# EAGLE board Thin_Spacer_C (EAGLE 9.5.2)
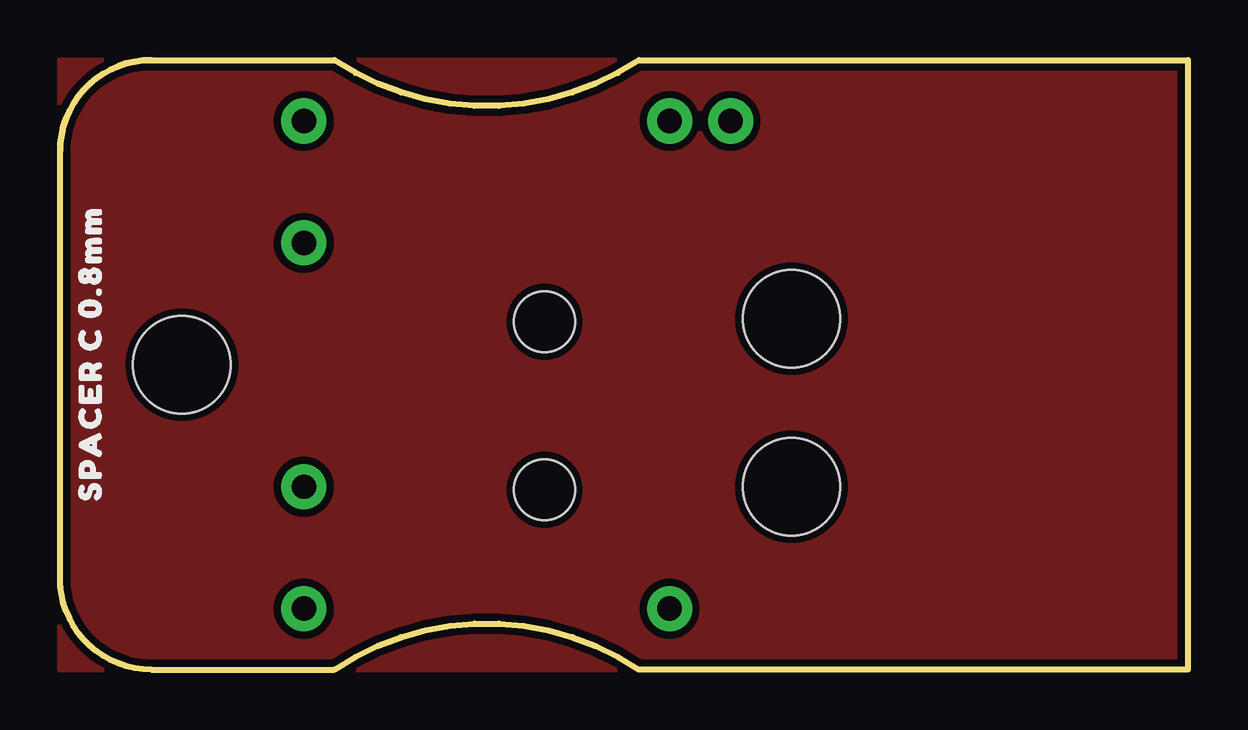
[diagram p0: board, top side]
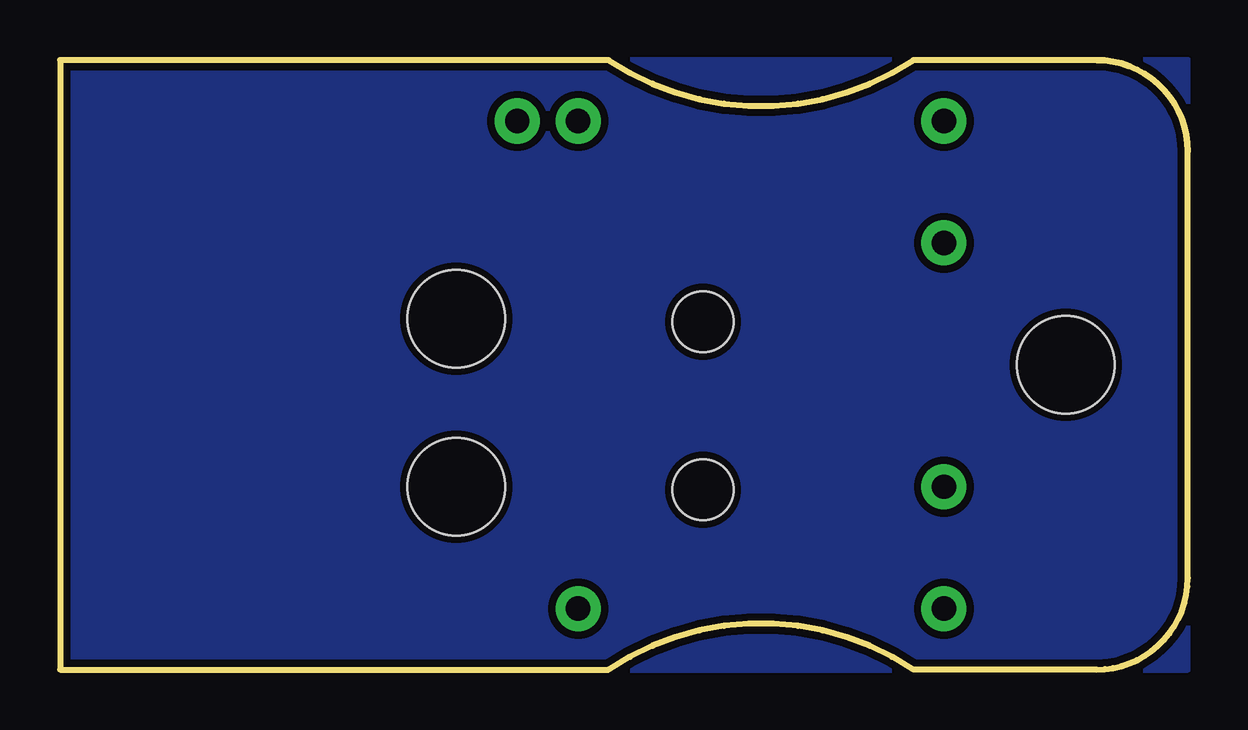
[diagram p1: board, bottom side, seen from below]

Size 46.99 x 25.4 mm. Coordinates in mm from the lower left corner, seen from the top.
Outline: 3.81,25.4 arc90 0,21.59
Outline: 3.81,0 arc-90 0,3.81
Outline: 0,21.59 arc-90 3.81,25.4
Outline: 3.81,25.4 11.43,25.4 arc67 24.13,25.4 46.99,25.4 46.99,0 24.13,0 arc67 11.43,0 3.81,0
Outline: 3.81,0 arc-90 0,3.81
Outline: 0,3.81 0,21.59
Copper layers (1*16): Top 0.035mm / dielectric 1.5mm / Bottom 0.035mm
Design rules "SparkFun-2-Layer-Minimum-JLCPCB": minimum track width 5mil, minimum drill 0.3mm, track to track 5mil, track to pad 5mil, pad to pad 5mil, via to via 5mil, smd to smd 5mil, copper to edge 7mil, drill to drill 7mil, minimum pad ring 5mil, minimum via ring 5mil, stop-mask expansion 4mil, vias tented up to drill 25mil, thermal gap 10mil
Holes 4.06 mm at 5.08,12.7 30.48,7.62 30.48,14.62
Holes 2.54 mm at 20.19,7.49 20.19,14.49

## Placement (x,y rotation side)
E$1  [SPACER_C_0#8MM0]  1.27,6.35 90 top

## Library data of the parts
E$1 = output

## Tracks (layer width: path | path; a pad name or v marks a point on that pad's centre or on a via)
N$30  (via drill 1.02 pad 1.88)
  other vias: 10.16,2.54
N$31  (via drill 1.02 pad 1.88)
  other vias: 10.16,22.86
N$32  (via drill 1.02 pad 1.88)
  other vias: 10.16,17.78
N$33  (via drill 1.02 pad 1.88)
  other vias: 10.16,7.62
N$34  (via drill 1.02 pad 1.88)
  other vias: 27.94,22.86
N$35  (via drill 1.02 pad 1.88)
  other vias: 25.4,22.86
N$36  (via drill 1.02 pad 1.88)
  other vias: 25.4,2.54
TAB3
  pour Top (isolate 0.305): 0,25.4 46.99,25.4 46.99,0 0,0
TAB4
  pour Bottom (isolate 0.305): 0,25.4 46.99,25.4 46.99,0 0,0